# Altium PCB MainPCB.PcbDoc
Units mil, origin at the board's own origin, x right, y up, seen from the top; angles counter-clockwise.
Board outline 1577.69 x 2280.87 mil, 2 copper layers (Top Layer, Bottom Layer); 22 components, 34 nets, 146 pads, 24 vias.
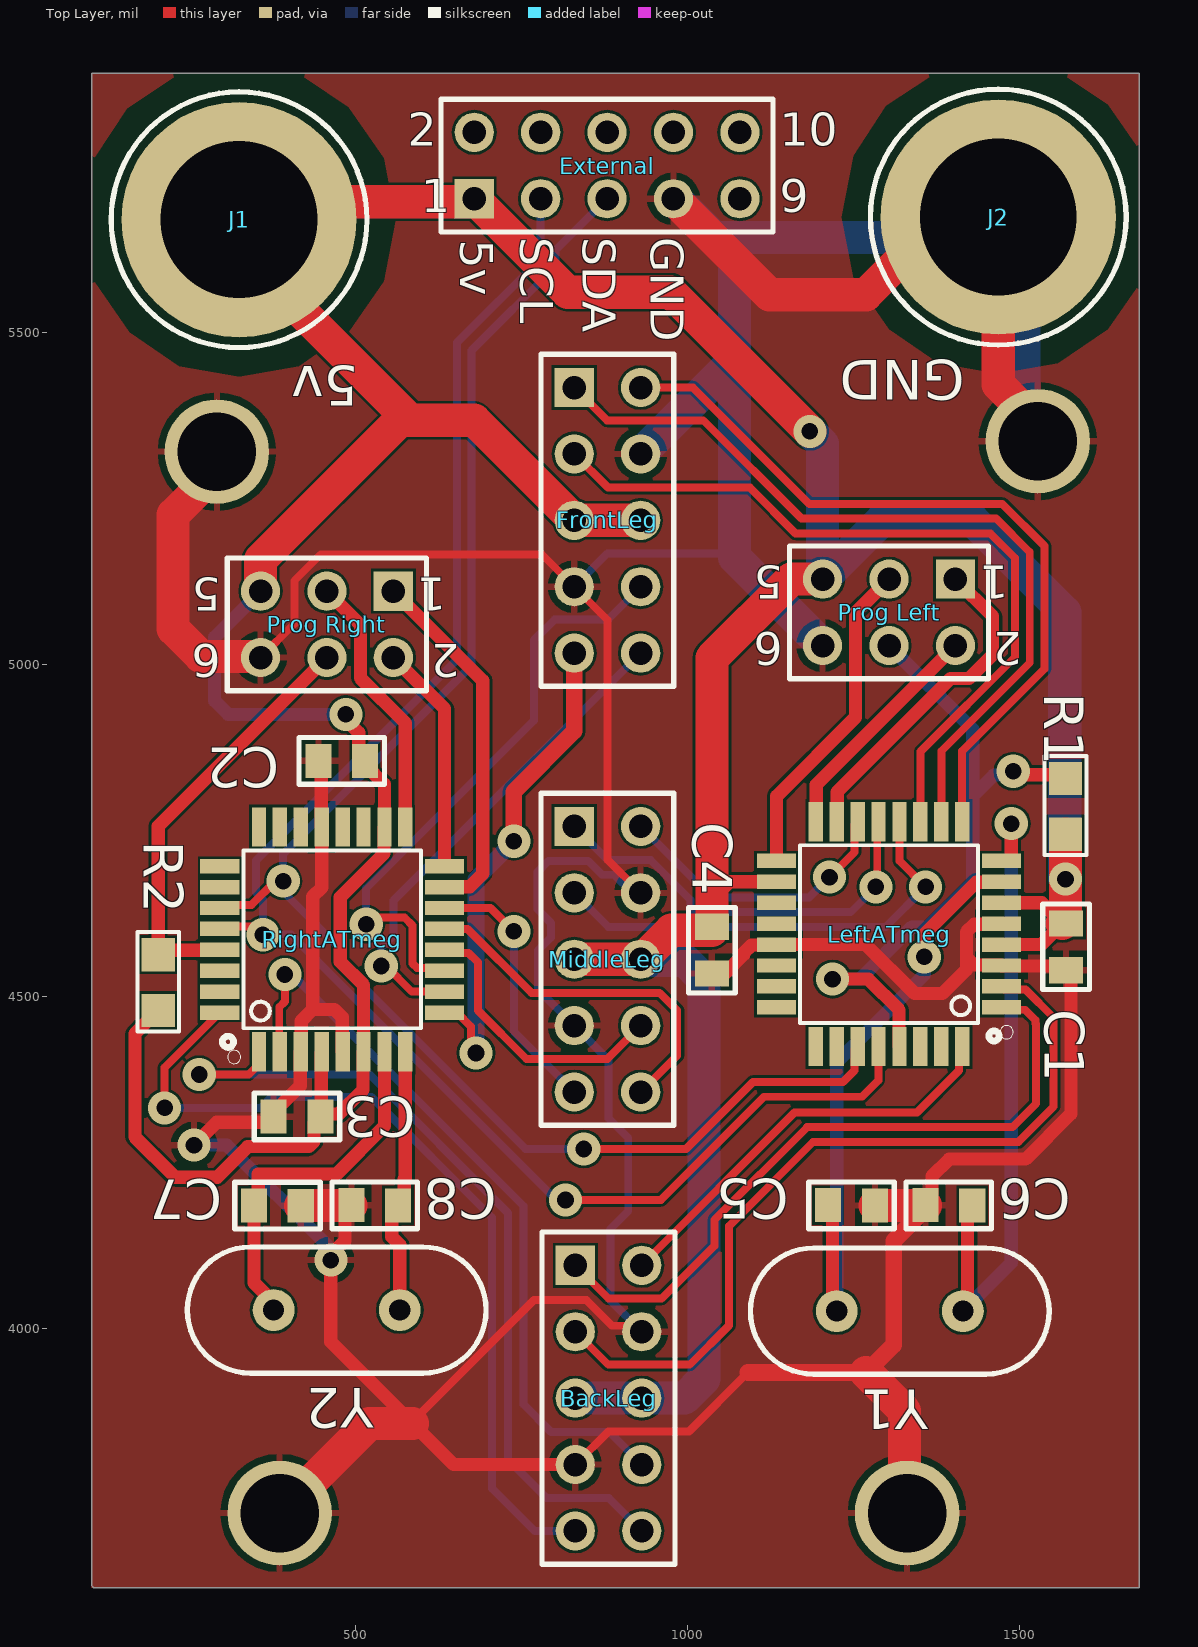
[diagram p0: Top Layer view]
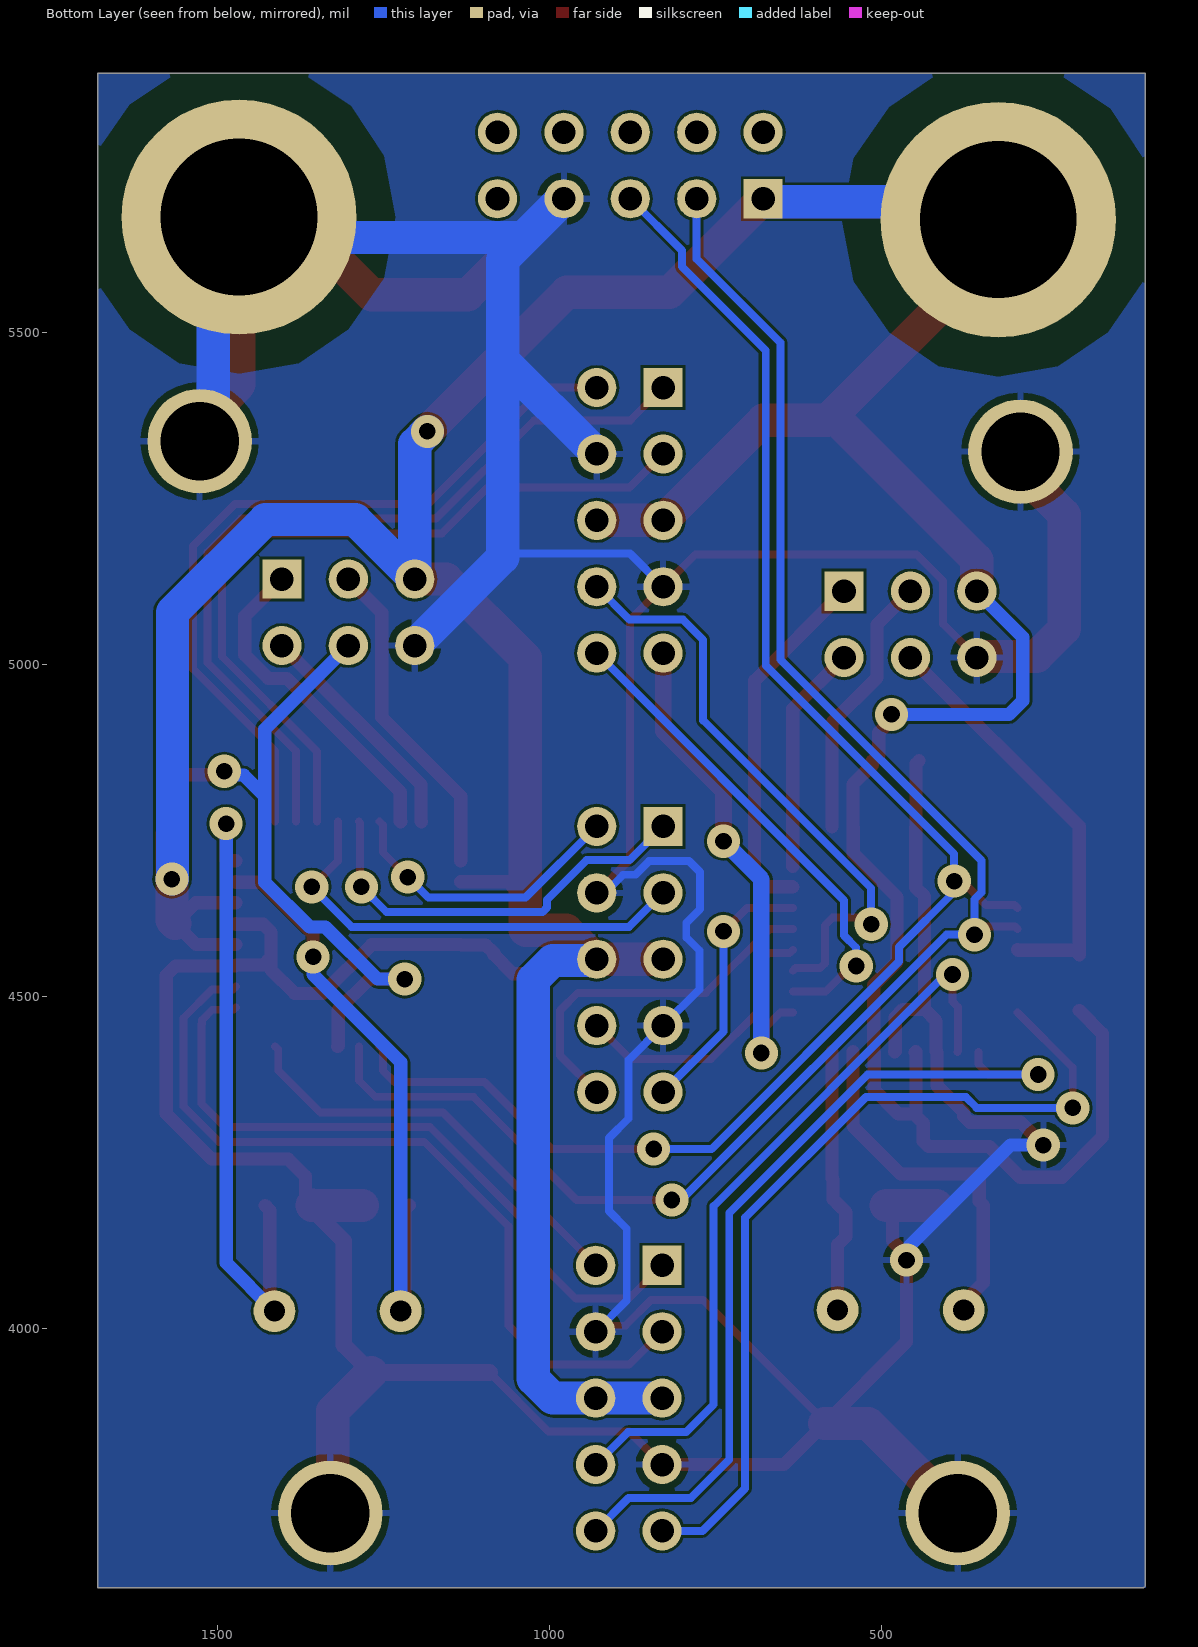
[diagram p1: Bottom Layer view, seen from below]
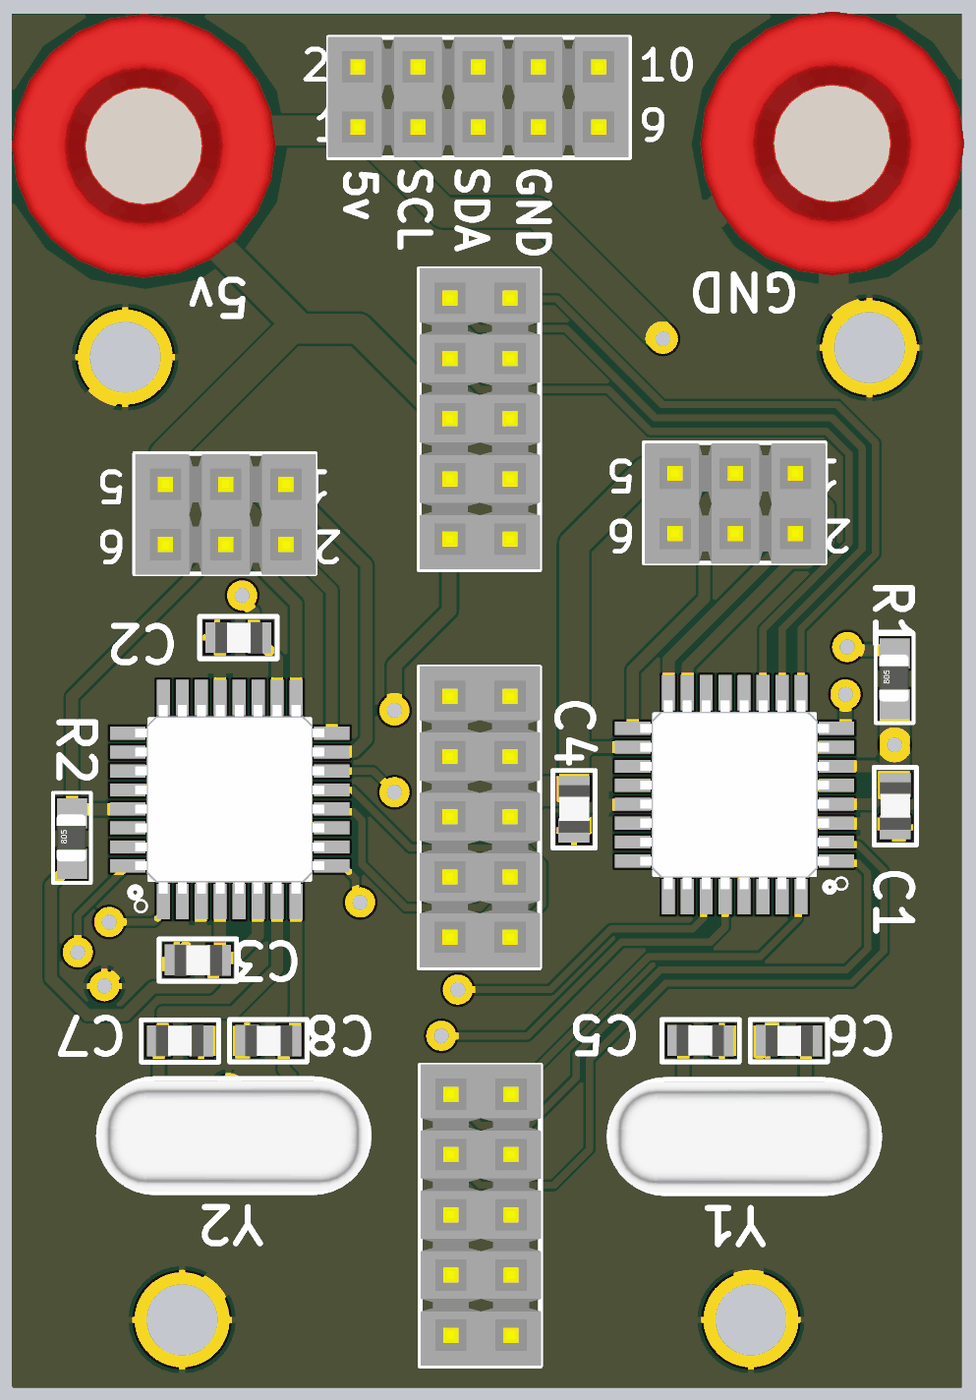
[diagram p2: 3D render of the assembled board from above, using the file's embedded part models]

## Layer stack, top to bottom
Top Solder: solder mask 0.4, Solder Resist, Dk 3.5
Top Layer: signal copper 1.4
Dielectric 1: dielectric 12.6, FR-4, Dk 4.8
Bottom Layer: signal copper 1.4
Bottom Solder: solder mask 0.4, Solder Resist, Dk 3.5

## Board outline
105.94,3609.88 103.05,3612.76 103.05,5890.75 1680.74,5890.75 1680.74,3609.88

## Design rules (kind name [scope] priority, off if disabled: settings)
Clearance [All] p1: gap=4 ignorepadtopadclearanceinfootprint=FALSE
HoleSize [All] p1: absolutevalues=TRUE maxlimit=393.7 minlimit=1 maxpercent=80.000 minpercent=20.000
MinimumSolderMaskSliver [All] p1: minsoldermaskwidth=3.94
PlaneClearance [All] p1: clearance=40
PolygonConnect [All] p1: connectstyle=Relief reliefconductorwidth=10 reliefentries=4 polygonreliefangle="90 Angle" airgapwidth=10
RoutingVias [All] p1: holewidth=15 width=30 viastyle="Through Hole" minholewidth=15 minwidth=30 maxholewidth=25 maxwidth=50
SilkToSolderMaskClearance [IsPad] p1: minsilkscreentomaskgap=3.94 clearancetoexposedcopper=TRUE
SolderMaskExpansion [All] p1: expansion=4
Width [All] p1: maxlimit=50 minlimit=10 preferedwidth=10
26 further rules are at their usual default settings.

## Components (designator, comment, footprint, x,y, rotation, side; value= is the part's Value field where it differs from the comment)
BackLeg "BARRETTE_5 CONTACTS_2 RANGEES_MALE_DROITE" BARRETTE_5X2_M_D 831.1,4095.51 r270 top
C1 "CMS_0805_AVCC" CONDENSATEUR_CMS_0805 1570.05,4539.96 r90 top value=10µF
C2 "CMS_0805_VCC" CONDENSATEUR_CMS_0805 444.09,4855.31 r0 top value=10µF
C3 "CMS_0805_AVCC" CONDENSATEUR_CMS_0805 376.77,4319.91 r0 top value=10µF
C4 "CMS_0805_VCC" CONDENSATEUR_CMS_0805 1036.64,4534.84 r90 top value=10µF
C5 "CMS_0805" CONDENSATEUR_CMS_0805 1282.28,4185.63 r180 top value=22pF
C6 "CMS_0805" CONDENSATEUR_CMS_0805 1358.43,4186.02 r0 top value=22pF
C7 "CMS_0805" CONDENSATEUR_CMS_0805 417.72,4185.24 r180 top value=22pF
C8 "CMS_0805" CONDENSATEUR_CMS_0805 493.87,4186.02 r0 top value=22pF
External "BARRETTE_5 CONTACTS_2 RANGEES_MALE_DROITE" BARRETTE_5X2_M_D 678.94,5701.77 r0 top
FrontLeg "BARRETTE_5 CONTACTS_2 RANGEES_MALE_DROITE" BARRETTE_5X2_M_D 829.53,5417.48 r270 top
J1 "Alim 5v" DOUILLE_BANANE_4mm 324.71,5670.28 r180 top
J2 "Alim GND" DOUILLE_BANANE_4mm 1468.14,5674.21 r180 top
LeftATmeg "ATMEGA328P-AU" QFP80P900X900X120-32N 1303.54,4594.29 r180 top
MiddleLeg "BARRETTE_5 CONTACTS_2 RANGEES_MALE_DROITE" BARRETTE_5X2_M_D 829.53,4756.5 r270 top
"Prog Left" "BARRETTE_3 CONTACTS_2 RANGEES_MALE_DROITE" BARRETTE_3X2_M_D 1403.54,5128.94 r180 top
"Prog Right" "BARRETTE_3 CONTACTS_2 RANGEES_MALE_DROITE" BARRETTE_3X2_M_D 557.09,5110.83 r180 top
R1 "RESISTANCE_CMS_0805" RESISTANCE_CMS_0805 1569.29,4744.74 r90 top value=10K
R2 "RESISTANCE_CMS_0805" RESISTANCE_CMS_0805 202.93,4479.33 r90 top value=10K
RightATmeg "ATMEGA328P-AU" QFP80P900X900X120-32N 464.96,4586.42 r90 top
Y1 "QUARTZ_DROIT_BAS_PROFIL" QUARTZ_DROIT_BP 1224.8,4026.57 r0 top value=16MHz
Y2 "QUARTZ_DROIT_BAS_PROFIL" QUARTZ_DROIT_BP 376.77,4028.15 r0 top value=16MHz

## Footprints (in the part's own frame and the unit in brackets; to place one, negate y for a bottom-side part, rotate by r counter-clockwise, add the part's x,y. Pads: shape width x height; smd on the part's side, far side on the other; paste and mask are expansions set on the pad)
BARRETTE_3X2_M_D [mm] "BARRETTE 3 CONTACTS ; 2 RANGEES ; DROITE ; MALE ; ESPACEMENT BROCHES = 2.54 mm"
  rect 1.5x1.5 hole 0.9: 1(0,0)
  round 1.5 hole 0.9: 2(0,2.54) 3(2.54,0) 4(2.54,2.54) 5(5.08,0) 6(5.08,2.54)
  silkscreen extent -1.27,-1.27 6.35,3.81, body extent -1.3,-1.24 6.32,3.84, height 10.67
BARRETTE_5X2_M_D [mm] "BARRETTE 5 CONTACTS ; 2 RANGEES ; DROITE ; MALE ; ESPACEMENT BROCHES = 2.54 mm"
  rect 1.5x1.5 hole 0.9: 1(0,0)
  round 1.5 hole 0.9: 2(0,2.54) 3(2.54,0) 4(2.54,2.54) 5(5.08,0) 6(5.08,2.54) 7(7.62,0) 8(7.62,2.54) 9(10.16,0) 10(10.16,2.54)
  silkscreen extent -1.27,-1.27 11.43,3.81, body extent -1.3,-1.24 11.4,3.84, height 10.67
CONDENSATEUR_CMS_0805 [mm] "CONDENSATEUR CMS 0805 ; DIMENSIONS : 2mm x 1.25mm"
  rect 1x1.3 smd: 1(0,0) 2(1.79,-0.01)
  silkscreen extent -0.74,-0.9 2.53,0.89, body extent -0.09,-0.67 1.91,0.64, height 0.73
DOUILLE_BANANE_4mm [mm] "DOUILLE BANANE ; DIAMETRE PASSAGE CONTACT = 4 mm ; DIAMETRE PERCAGE = 6 mm"
  round 9 hole 6: 1(0,0)
  Top Layer pour cut-out: -5.55,2.35 -4.2,4.3 -2.3,5.6 0,6 2.3,5.6 4.2,4.3 5.55,2.35 6,0 5.55,-2.35 4.3,-4.25 2.35,-5.55 0,-6 -2.35,-5.55 -4.2,-4.3 -5.55,-2.35 -6,0
  Bottom Layer pour cut-out: -5.55,2.35 -4.2,4.3 -2.3,5.6 0,6 2.3,5.6 4.2,4.3 5.55,2.35 6,0 5.55,-2.35 4.3,-4.25 2.35,-5.55 0,-6 -2.35,-5.55 -4.2,-4.3 -5.55,-2.35 -6,0
  silkscreen extent -4.89,-4.89 4.89,4.89, body extent -5.5,-5.6 5.63,5.53, height 4.79
QFP80P900X900X120-32N [mm]
  rect 1.5x0.55 smd: 1(-4.3,2.8) 2(-4.3,2) 3(-4.3,1.2) 4(-4.3,0.4) 5(-4.3,-0.4) 6(-4.3,-1.2) 7(-4.3,-2) 8(-4.3,-2.8) 17(4.3,-2.8) 18(4.3,-2) 19(4.3,-1.2) 20(4.3,-0.4) 21(4.3,0.4) 22(4.3,1.2) 23(4.3,2) 24(4.3,2.8)
  rect 0.55x1.5 smd: 9(-2.8,-4.3) 10(-2,-4.3) 11(-1.2,-4.3) 12(-0.4,-4.3) 13(0.4,-4.3) 14(1.2,-4.3) 15(2,-4.3) 16(2.8,-4.3) 25(2.8,4.3) 26(2,4.3) 27(1.2,4.3) 28(0.4,4.3) 29(-0.4,4.3) 30(-1.2,4.3) 31(-2,4.3) 32(-2.8,4.3)
  silkscreen extent -4.75,-3.4 3.4,4, body extent -4.5,-4.5 4.5,4.5, height 0.53
QUARTZ_DROIT_BP [mil] "QUARTZ DROIT BAS PROFIL ; DIMENSIONS : 11.43mm x 4.82mm ; ESPACEMENT BROCHES : 4.82mm"
  round 63 hole 32: 1(0,0) 2(190,0)
  silkscreen extent -130,-95 320,95, body extent -129,-93 318,91, height 138
RESISTANCE_CMS_0805 [mil] "RESISTANCE CMS 0805 ; DIMENSIONS : 2mm x 1.25mm"
  rect 50x50 smd: 1(0,0) 2(84,0)
  silkscreen extent -31,-31 118,31, body extent 4,-24 83,26, height 31

## Part data
BackLeg External FrontLeg MiddleLeg: "BARRETTE 5 CONTACTS 2 RANGEES MALE DROITE", Type=M_D_5X2
C1 C2 C3 C4 C5 C6 C7 C8: library part CONDENSATEUR_CMS_CER_0805, "CONDENSATEUR CMS CERAMIQUE 0805", Type=CMS_0805
J1 J2: library part DOUILLE_BANANE_4mm, "DOUILLE BANANE 4 mm", Type=BANANE_4mm
LeftATmeg RightATmeg: "AVR AVR® ATmega Microcontroller IC 8-Bit 20MHz 32KB (16K x 16) FLASH 32-TQFP (7x7)", Package="TQFP-32 Microchip", Availability="In Stock", Check_prices=https://www.snapeda.com/parts/ATMEGA328P-AU/Microchip/view-part/?ref=eda, MF="Microchip Technology", MP=ATMEGA328P-AU, Price=None, Purchase-URL=https://pricing.snapeda.com/search/part/ATMEGA328P-AU/?ref=eda, SnapEDA_Link=https://www.snapeda.com/parts/ATMEGA328P-AU/Microchip/view-part/?ref=snap
"Prog Left" "Prog Right": "BARRETTE 3 CONTACTS 2 RANGEES MALE DROITE", Type=M_D_3X2
R1 R2: "RESISTANCE CMS 0805", Type=CMS_0805
Y1 Y2: "QUARTZ DROIT BAS PROFIL", Type=DROIT_BP

## Free pads (board coordinates)
  round 157.48 hole 118.11: 2(291.34,5320.87) 2(385.83,3722.44) 2(1330.71,3722.44) 2(1527.56,5336.61)

## Via types
v1: diameter 50, hole 25, Top Layer to Bottom Layer, 24 vias

## Nets (pads, with @x,y where several pads share a name; then routed paths per layer and width w, separated by ;. In a path a pad name is that pad's centre, name@x,y a point inside that pad or via, vN(x,y) a via of type N, cw(c..) or ccw(c..) an arc to the next point about the centre after c; other vN are vias at no path point)
+5: "Prog Left.5" "Prog Right.5" BackLeg.5 BackLeg.6 C1.2 C2.2 C3.2 C4.2 External.1 FrontLeg.5 FrontLeg.6 J1.1 LeftATmeg.4 LeftATmeg.6 LeftATmeg.18 MiddleLeg.5 MiddleLeg.6 R1.1 R2.1 RightATmeg.4 RightATmeg.6 RightATmeg.18 | length 7677
  Top Layer w10: C1.2 C1.2@1585.01,4625
  Top Layer w12: J1.1 J1.1@324.71,5693.23
  Top Layer w20: R2.1 167.94,4444.33 167.94,4381.52 167.94,4288.76 228.35,4228.35 292.02,4228.35 337.99,4274.32 429.49,4274.32 437.56,4282.39 437.56,4309.83 C3.2 C3.2@448.54,4320.82 ; RightATmeg.4 449.88,4416.46 448.54,4415.12 C3.2@448.54,4320.82 ; v1(485.63,4925.2) 485.63,4917.08 504.88,4897.83 504.88,4864.61 C2.2 514.57,4849.02 543.7,4819.88 RightATmeg.18 543.03,4755.04 543.03,4715.87 477.14,4649.98 477.14,4552.74 512.2,4517.68 RightATmeg.6 511.54,4416.46 511.54,4359.76 475.2,4323.43 451.15,4323.43 C3.2@448.54,4320.82 ; 1037.04,4646.65 1063.42,4673.03 LeftATmeg.18 ; LeftATmeg.4 1532.65,4578.54 1564.54,4610.43 1533.43,4641.54 LeftATmeg.6
  Top Layer w50: 357.09,5110.83 357.09,5158.02 567.14,5368.07 ; MiddleLeg.5 MiddleLeg.6 931.98,4556.5 975.48,4600 1036.45,4600 1037.04,4600.59 C4.2 1037.04,4646.65 1037.04,5010.07 1155.91,5128.94 1203.54,5128.94 ; FrontLeg.6 FrontLeg.5 678.94,5368.07 582.22,5368.07 324.71,5625.59 J1.1 351.67,5697.24 674.41,5697.24 External.1 819.68,5561.02 974.8,5561.02 v1(1184.45,5351.38) ; C1.2@1564.54,4610.43 1569.29,4615.19 v1(1569.29,4677.17) R1.1
  Bottom Layer w20: 357.09,5110.83 287.8,5041.54 287.8,4945.87 308.46,4925.2 v1(485.63,4925.2)
  Bottom Layer w50: J1.1 351.67,5697.24 674.41,5697.24 External.1 ; BackLeg.5 BackLeg.6 995.71,3895.51 1025,3924.8 1025,4525.47 995.71,4554.76 931.26,4554.76 MiddleLeg.6 ; v1(1184.45,5351.38) 1203.54,5332.28 1203.54,5128.94 1293.11,5218.5 1428.78,5218.5 1568.31,5078.98 1568.31,4678.15 v1(1569.29,4677.17)
GND: "Prog Left.6" "Prog Right.6" BackLeg.4 BackLeg.7 C1.1 C2.1 C3.1 C4.1 C5.1 C6.1 C7.1 C8.1 External.7 FrontLeg.4 FrontLeg.7 J2.1 LeftATmeg.3 LeftATmeg.5 LeftATmeg.21 MiddleLeg.4 MiddleLeg.7 pad.2 RightATmeg.3 RightATmeg.5 RightATmeg.21 | length 10473.1
  Top Layer w12: pad.2@229.38,5291.78 pad.2@291.34,5291.78 ; 357.09,5010.83 407.87,5061.61 407.87,5126.38 447.83,5166.34 780.67,5166.34 FrontLeg.7 879.33,5067.68 879.33,4706.69 MiddleLeg.4 ; 586.02,3857.28 586.02,3860.24 769.09,4043.31 847.69,4043.31 886.48,4004.51 922.1,4004.51 BackLeg.4 ; BackLeg.7 881.06,3845.47 1002.36,3845.47 1090.94,3934.06
  Top Layer w20: v1(256.89,4276.57) 291.17,4310.86 367.72,4310.86 C3.1 376.77,4325.82 417.05,4366.09 417.05,4416.46 RightATmeg.3 418.39,4417.8 418.39,4463.46 435.83,4480.91 ; C2.1 448.54,4850.87 448.54,4756.38 RightATmeg.21 449.21,4664.47 435.83,4651.09 435.83,4480.91 ; RightATmeg.5 480.04,4417.8 480.04,4469.19 468.32,4480.91 435.83,4480.91 ; C8.1 493.47,4185.63 484.18,4176.34 484.18,4132.66 462.99,4111.46 v1(462.99,4103.35) 462.99,3980.32 586.02,3857.28 647.8,3795.51 BackLeg.7 ; C4.1 1055.91,4534.84 1084.72,4563.66 1084.72,4566.16 1096.44,4577.87 1133.58,4577.87 LeftATmeg.21 1268.31,4578.54 1341.93,4504.92 1384.25,4504.92 1420.08,4540.75 1420.08,4559.65 ; C6.1 1368.12,4195.71 1368.12,4229.52 1394.09,4255.5 1509.19,4255.5 1577.57,4323.88 1577.57,4532.44 C1.1 1563.63,4546.38 1473.5,4546.38 LeftATmeg.3 1472.17,4547.72 1432.01,4547.72 1420.08,4559.65 ; LeftATmeg.5 1472.17,4609.37 1431.79,4609.37 1420.08,4597.65 1420.08,4559.65
  Top Layer w25: 1090.94,3934.06 1269.09,3934.06 1310.43,3975.39 1310.43,4132.12 1358.43,4180.12 C6.1
  Top Layer w50: pad.2@291.34,5291.78 225.39,5225.84 225.39,5054.13 266.97,5012.56 355.35,5012.56 357.09,5010.83 ; pad.2@385.83,3722.44 520.67,3857.28 586.02,3857.28 ; C7.1 418.11,4185.63 C8.1@493.47,4185.63 ; External.7 1123.62,5557.09 1268.67,5557.09 1385.79,5674.21 J2.1 1468.14,5422.05 1527.56,5362.63 pad.2@1527.56,5336.61 ; 1269.09,3934.06 1326.97,3876.18 1326.97,3726.18 pad.2@1330.71,3722.44 ; C5.1 1282.48,4185.83 1358.24,4185.83 C6.1
  Bottom Layer w12: FrontLeg.7 879.37,5167.32 1065.16,5167.32 1070.87,5161.61 ; MiddleLeg.4 916.79,4656.5 889.58,4683.71 871.2,4683.71 850.49,4704.42 790.45,4704.42 774.02,4687.99 774.02,4631.89 794.69,4611.22 794.69,4589.57 775,4569.88 775,4511.02 MiddleLeg.7 881.3,4404.72 881.3,4316.93 910.83,4287.4 910.83,4177.17 884.25,4150.59 884.25,4042.36 BackLeg.4
  Bottom Layer w20: v1(256.89,4276.57) 306.5,4276.57 v1@457.25,4125.82
  Bottom Layer w50: FrontLeg.4 1070.87,5458.82 ; 1203.54,5028.94 1070.87,5161.61 1070.87,5458.82 ; pad.2@1527.56,5336.61 1506.99,5357.18 1506.99,5635.36 J2.1 1437.17,5643.24 1039.91,5643.24 981.39,5701.77 External.7 1070.87,5609.84 1070.87,5458.82
MISO1: "Prog Left.2" LeftATmeg.16 | length 352.4
  Top Layer w20: LeftATmeg.16 1193.98,4764.25 1193.98,4819.37 1403.54,5028.94
MISO2: "Prog Right.2" RightATmeg.16 | length 346.1
  Top Layer w20: 557.09,5010.83 634.25,4933.66 RightATmeg.16
MOSI1: "Prog Left.1" LeftATmeg.15 | length 501.9
  Top Layer w20: LeftATmeg.15 1225.47,4764.25 1225.47,4808.44 1396.44,4979.41 1424.06,4979.41 1459.45,5014.8 1459.45,5073.03 1403.54,5128.94
MOSI2: "Prog Right.1" RightATmeg.15 | length 547
  Top Layer w20: 557.09,5110.83 691.73,4976.18 691.73,4685.5 672.06,4665.83 634.92,4665.83 RightATmeg.15
NetBackLeg_1: BackLeg.1 LeftATmeg.1 | length 1044.2
  Top Layer w12: BackLeg.1 881.34,4045.28 961.02,4045.28 1040.4,4124.65 1040.4,4163.64 1180.26,4303.5 1489.31,4303.5 1524.7,4338.88 1524.7,4458.96 1524.02,4459.65 1524.02,4464.74 1508.36,4480.4 1476.49,4480.4 LeftATmeg.1
NetBackLeg_2: BackLeg.2 LeftATmeg.32 | length 637.6
  Top Layer w12: BackLeg.2 1161.09,4325.5 1345.76,4325.5 1409.11,4388.85 1409.11,4420.33 LeftATmeg.32
NetBackLeg_3: BackLeg.3 LeftATmeg.2 | length 1221.7
  Top Layer w12: BackLeg.3 880.75,3945.87 1003.35,3945.87 1062.4,4004.92 1062.4,4154.53 1189.37,4281.5 1498.43,4281.5 1551.57,4334.65 1551.57,4468.3 1508.99,4510.88 1477.5,4510.88 LeftATmeg.2
NetBackLeg_8: BackLeg.8 RightATmeg.2 | length 1138.4
  Top Layer w12: RightATmeg.2 385.24,4418.11 385.24,4484.25 393.7,4492.72 v1(393.7,4533.46)
  Bottom Layer w12: v1(393.7,4533.46) 404.53,4533.46 753.35,4184.65 753.35,3885.83 794.69,3844.49 882.12,3844.49 BackLeg.8
NetBackLeg_9: BackLeg.9 RightATmeg.32 | length 1312.8
  Top Layer w12: v1(212.6,4332.68) 212.6,4393.11 RightATmeg.32
  Bottom Layer w12: v1(212.6,4332.68) 357.28,4332.68 373.72,4349.11 524.1,4349.11 705.99,4167.21 705.99,3759.56 770.04,3695.51 BackLeg.9
NetBackLeg_10: BackLeg.10 RightATmeg.1 | length 1283.7
  Top Layer w12: v1(264.76,4382.87) 339.17,4382.87 354.72,4398.43 RightATmeg.1
  Bottom Layer w12: v1(264.76,4382.87) 521.45,4382.87 729.92,4174.4 729.92,3802.96 787.8,3745.08 881.53,3745.08 BackLeg.10
NetFrontLeg_1: FrontLeg.1 LeftATmeg.10 | length 1249.8
  Top Layer w12: FrontLeg.1 878.9,5368.11 1023.63,5368.11 1171.65,5220.09 1464.96,5220.09 1515.5,5169.55 1515.5,5002.97 1382.28,4869.75 LeftATmeg.10
NetFrontLeg_2: FrontLeg.2 LeftATmeg.9 | length 1173.2
  Top Layer w12: FrontLeg.2 1008.07,5417.48 1183.46,5242.09 1474.07,5242.09 1537.5,5178.66 1537.5,4993.86 1413.78,4870.14 LeftATmeg.9
NetFrontLeg_3: FrontLeg.3 LeftATmeg.11 | length 1185
  Top Layer w12: FrontLeg.3 880.28,5266.73 1093.9,5266.73 1162.8,5197.83 1456.1,5197.83 1493.5,5160.43 1493.5,5012.09 1350.79,4869.37 LeftATmeg.11
NetFrontLeg_8: FrontLeg.8 RightATmeg.11 | length 915.3
  Top Layer w12: v1(516.14,4609.25) 526.97,4609.25 536.81,4619.09 574.21,4619.09 586.02,4607.28 586.02,4550.2 592.91,4543.31 630.12,4543.31 RightATmeg.11
  Bottom Layer w12: v1(516.14,4609.25) 516.14,4663.39 769.09,4916.34 769.09,5037.4 799.61,5067.91 879.96,5067.91 FrontLeg.8
NetFrontLeg_9: FrontLeg.9 RightATmeg.9 | length 761.6
  Top Layer w12: RightATmeg.9 652.95,4476.18 674.23,4454.91 674.23,4422.63 v1(681.5,4415.35)
  Top Layer w25: v1(681.5,4415.35) v1@681.5,4422.12 ; v1(738.58,4734.25) 738.58,4808.99 829.53,4899.94 FrontLeg.9
  Bottom Layer w25: v1(681.5,4415.35) 681.5,4677.17 v1(738.58,4734.25)
NetFrontLeg_10: FrontLeg.10 RightATmeg.10 | length 744.5
  Top Layer w12: v1(538.78,4546.26) 546.26,4546.26 584.84,4507.68 RightATmeg.10
  Bottom Layer w12: v1(538.78,4546.26) 538.78,4573.91 557.14,4592.27 557.14,4645.1 FrontLeg.10
NetLeftATmeg_12: LeftATmeg.12 MiddleLeg.3 | length 689.7
  Top Layer w12: LeftATmeg.12 1319.29,4704.72 v1(1358.66,4665.35)
  Bottom Layer w12: MiddleLeg.3 880.71,4605.31 1298.62,4605.31 v1(1358.66,4665.35)
NetLeftATmeg_13: LeftATmeg.13 MiddleLeg.1 | length 630.3
  Top Layer w12: v1(1283.86,4665.35) 1285.83,4667.32 1285.83,4761.61 LeftATmeg.13
  Bottom Layer w12: MiddleLeg.1 880.31,4705.71 944.7,4705.71 1004.33,4646.08 1004.33,4634.34 1011.36,4627.31 1245.82,4627.31 v1(1283.86,4665.35)
NetLeftATmeg_14: LeftATmeg.14 MiddleLeg.2 | length 442.6
  Top Layer w12: v1(1213.98,4680.12) 1251.63,4717.77 1251.63,4758.91 LeftATmeg.14
  Bottom Layer w12: MiddleLeg.2 1036.71,4649.31 1183.17,4649.31 v1(1213.98,4680.12)
NetMiddleLeg_8: MiddleLeg.8 RightATmeg.12 | length 426.5
  Top Layer w12: RightATmeg.12 638.92,4566 670.41,4566 684.45,4551.96 684.45,4479.33 757.28,4406.5 879.53,4406.5 MiddleLeg.8
NetMiddleLeg_9: MiddleLeg.9 RightATmeg.14 | length 398.5
  Top Layer w12: RightATmeg.14 703.35,4633.66 v1(738.58,4598.43)
  Bottom Layer w12: v1(738.58,4598.43) 738.58,4447.44 MiddleLeg.9
NetMiddleLeg_10: MiddleLeg.10 RightATmeg.13 | length 546.9
  Top Layer w12: RightATmeg.13 668.9,4602.17 765.16,4505.91 958.07,4505.91 984.65,4479.33 984.65,4411.61 MiddleLeg.10
OSC11: C5.2 LeftATmeg.7 Y1.1 | length 935.8
  Top Layer w20: C5.2 1218.31,4179.53 1218.31,4033.07 Y1.1 ; v1(1356.69,4560.04) 1356.69,4594.03 1435.02,4672.36 1472.17,4672.36 LeftATmeg.7
  Bottom Layer w20: Y1.1 1224.8,4401.47 1356.69,4533.36 v1(1356.69,4560.04)
OSC12: C6.2 LeftATmeg.8 Y1.2 | length 1000.3
  Top Layer w20: Y1.2 1421.86,4033.63 1421.86,4178.58 C6.2 ; LeftATmeg.8 1472.93,4704.63 1487.6,4704.63 v1(1487.6,4760.83)
  Bottom Layer w20: Y1.2 1487.6,4099.37 v1(1487.6,4760.83)
OSC21: C7.2 RightATmeg.7 Y2.1 | length 551.6
  Top Layer w20: Y2.1 376.77,4039.79 347.24,4069.31 C7.2 353.62,4192.01 353.62,4232.97 471.45,4232.97 543.7,4305.22 RightATmeg.7
OSC22: C8.2 RightATmeg.8 Y2.2 | length 402.5
  Top Layer w20: Y2.2 566.77,4126.35 554.66,4138.46 554.66,4175.94 C8.2 573.62,4194.91 573.62,4225 575.2,4226.57 RightATmeg.8
Reset1: "Prog Left.4" LeftATmeg.29 R1.2 | length 1006.7
  Top Layer w20: v1(1218.5,4526.57) 1272.21,4526.57 1318.62,4480.17 1318.62,4425.67 LeftATmeg.29 ; v1@1496.29,4833.83 1496.62,4834.15 1563.88,4834.15 R1.2
  Bottom Layer w20: v1(1218.5,4526.57) 1259.59,4526.57 1338.05,4605.04 1361.99,4605.04 1429.53,4672.58 1429.53,4802.17 ; 1303.54,5028.94 1429.53,4902.95 1429.53,4802.17 ; v1(1490.55,4839.57) 1484.81,4833.83 1461.19,4833.83 1429.53,4802.17
Reset2: "Prog Right.4" R2.2 RightATmeg.29 | length 648.5
  Top Layer w20: RightATmeg.29 295,4570 209.6,4570 R2.2 202.93,4756.68 457.09,5010.83
SCK1: "Prog Left.3" LeftATmeg.17 | length 494.5
  Top Layer w20: LeftATmeg.17 1134.25,4802.07 1253.07,4920.89 1253.07,5078.46 1303.54,5128.94
SCK2: "Prog Right.3" RightATmeg.17 | length 404
  Top Layer w20: 457.09,5110.83 507.56,5060.35 507.56,4980.04 575.2,4912.4 RightATmeg.17
SCL: External.3 LeftATmeg.28 RightATmeg.28 | length 2579.9
  Top Layer w12: RightATmeg.28 299.21,4605.71 348.43,4605.71 v1(360.63,4593.5) ; v1(816.34,4193.9) 959.83,4193.9 1115.34,4349.41 1263.05,4349.41 1287.8,4374.16 LeftATmeg.28
  Bottom Layer w12: External.3 778.94,5611.22 652.95,5485.24 652.95,5007.87 350.14,4705.06 350.14,4657.23 360.63,4646.74 v1(360.63,4593.5) 402.84,4593.5 802.45,4193.9 v1(816.34,4193.9)
SDA: External.5 LeftATmeg.27 RightATmeg.27 | length 2479
  Top Layer w12: RightATmeg.27 300,4637.99 343.2,4637.99 379.42,4674.21 v1(391.14,4674.21) ; v1(843.9,4270.67) 997.79,4270.67 1098.53,4371.41 1234.19,4371.41 1251.63,4388.85 1251.63,4420.33 LeftATmeg.27
  Bottom Layer w12: v1(843.9,4270.67) 756.39,4270.67 474.12,4552.94 474.12,4575.08 391.14,4658.05 v1(391.14,4674.21) 391.14,4714.95 674.95,4998.76 674.95,5473.43 800.94,5599.41 800.94,5623.77 External.5
pads on no net: External.2 External.4 External.6 External.8 External.9 External.10 LeftATmeg.19 LeftATmeg.20 LeftATmeg.22 LeftATmeg.23 LeftATmeg.24 LeftATmeg.25 LeftATmeg.26 LeftATmeg.30 LeftATmeg.31 RightATmeg.19 RightATmeg.20 RightATmeg.22 RightATmeg.23 RightATmeg.24 RightATmeg.25 RightATmeg.26 RightATmeg.30 RightATmeg.31

## Polygon pours and split planes (outlines as drawn)
GND on Top Layer (solid, pour order 0): 102.36,5889.76 102.36,3610.24 1681.1,3610.24 1681.1,5889.76
GND on Bottom Layer (solid, pour order 2): 1681.1,3610.24 102.36,3610.24 102.36,5889.76 1681.1,5889.76

## Silkscreen, mask and mechanical layers (free items; w line width, h text height)
Top Overlay:
  circle w10: c1461.61,4440.94 r7.69
  circle w10: c308.07,4432.09 r8.47
  text "SCL" at 748.03,5643.7 h50 r270
  text "SDA" at 842.52,5643.7 h50 r270
  text "GND" at 944.88,5643.7 h50 r270
  text "5v" at 657.48,5639.76 h50 r270
  text "GND" at 1417.32,5458.66 h60 r180
  text "5v" at 503.94,5449.8 h60 r180
Mechanical 1:
  lines w10: 103.05,3612.76 105.94,3609.88 224.05,3609.88 1680.74,3609.88 1680.74,5890.75 103.05,5890.75 103.05,3612.76

## Text inside footprints (layer, text, board x,y; h text height)
External: Top Overlay "10" at 1138.94,5781.77 h50; Top Overlay "9" at 1138.94,5681.77 h50; Top Overlay "1" at 598.94,5681.77 h50; Top Overlay "2" at 578.94,5781.77 h50
"Prog Left": Top Overlay "6" at 1143.54,5048.94 h50 r180; Top Overlay "5" at 1143.54,5148.94 h50 r180; Top Overlay "2" at 1503.54,5048.94 h50 r180; Top Overlay "1" at 1483.54,5148.94 h50 r180
"Prog Right": Top Overlay "6" at 297.09,5030.83 h50 r180; Top Overlay "5" at 297.09,5130.83 h50 r180; Top Overlay "2" at 657.09,5030.83 h50 r180; Top Overlay "1" at 637.09,5130.83 h50 r180